# EAGLE board Adafruit BMP280 STEMMA QT (EAGLE 9.6.2)

Size 160 x 100 mm. Coordinates in mm from the lower left corner, seen from the top.
Outline: 0,0 160,0 160,100 0,100 0,0
Copper layers (1*16): Top 0.035mm / dielectric 1.5mm / Bottom 0.035mm
Design rules "default": minimum track width 6mil, minimum drill 0.35mm, track to track 6mil, track to pad 6mil, pad to pad 6mil, via to via 6mil, smd to smd 6mil, copper to edge 40mil, drill to drill 6mil, minimum pad ring 10mil, minimum via ring 8mil, stop-mask expansion 4mil, vias tented up to drill 0mil, thermal gap 10mil
Net classes: 1 highpower: width 0.305 mm, drill 0.483 mm; 2 lowpower: width 0.305 mm, drill 0.483 mm

## Footprints (pad centres in the part's own frame; a part is rotated, then mirrored left to right if it is on the bottom)
0603-NO = smd 1.075 x 1: 1 -0.85,0; 2 0.85,0
0805-NO = smd 1.24 x 1.5: 1 -0.95,0; 2 0.95,0
JST_SH4 = smd 0.6 x 1.55: 1 -1.5,2.514; 2 -0.5,2.514; 3 0.5,2.514; 4 1.5,2.514 | smd 1.2 x 1.8: MT1 -2.8,-1.386; MT2 2.8,-1.386
CHIPLED_0603_NOOUTLINE = smd 0.8 x 0.8: A 0,-0.75; C 0,0.75
SOD-323 = smd 1.35 x 0.8: A 1.27,0; C -1.27,0
FIDUCIAL_1MM = smd 1 x 1: 1 0,0
1X07_ROUND_70 = drill 1 pad 1.778: 1 -7.62,0; 2 -5.08,0; 3 -2.54,0; 4 0,0; 5 2.54,0; 6 5.08,0; 7 7.62,0
SOT363 = smd 0.5 x 0.5: 1 -0.75,-0.9; 3 0.75,-0.9; 4 0.75,0.9; 6 -0.75,0.9 | smd 0.4 x 0.5: 2 0,-0.9; 5 0,0.9
RESPACK_4X0603 = smd 0.45 x 0.9: 1 -1.3,-0.85; 2 -0.4,-0.85; 3 0.4,-0.85; 4 1.3,-0.85; 5 1.3,0.85; 6 0.4,0.85; 7 -0.4,0.85; 8 -1.3,0.85
SOLDERJUMPER_ARROW_NOPASTE = smd 0.762 x 1.524: 1 -1.016,0; 2 1.016,0
BMX280_COMBO = smd 0.725 x 0.35: 1 0.925,0.975; 2 0.925,0.325; 3 0.925,-0.325; 4 0.925,-0.975; 5 -0.925,-0.975; 6 -0.925,-0.325; 7 -0.925,0.325; 8 -0.925,0.975
SOT23-5 = smd 0.55 x 1.2: 1 -0.95,-1.3; 2 0,-1.3; 3 0.95,-1.3; 4 0.95,1.3; 5 -0.95,1.3
MOUNTINGHOLE_2.5_PLATED = drill 2.5 pad 3.2: P$1 0,0

## Placement (x,y rotation side)
C1  0.1uF  [0603-NO]  -27.94,25.4 0 top  (outside the outline)
C2  10uF  [0805-NO]  -16.51,25.4 0 top  (outside the outline)
C3  10uF  [0805-NO]  -22.86,25.4 0 top  (outside the outline)
CONN3  STEMMA_I2C_QT  [JST_SH4]  -16.51,5.08 0 top  (outside the outline)
CONN4  STEMMA_I2C_QT  [JST_SH4]  -25.4,5.08 0 top  (outside the outline)
D1  GREEN  [CHIPLED_0603_NOOUTLINE]  -27.94,21.59 0 top  (outside the outline)
D2  1N4148  [SOD-323]  -15.24,12.7 0 top  (outside the outline)
FID3  FIDUCIAL_1MM  [FIDUCIAL_1MM]  -24.13,27.94 0 top  (outside the outline)
FID4  FIDUCIAL_1MM  [FIDUCIAL_1MM]  -26.67,27.94 0 top  (outside the outline)
JP1  [1X07_ROUND_70]  -21.59,16.51 0 top  (outside the outline)
Q2  BSS138  [SOT363]  -34.29,21.59 0 top  (outside the outline)
R1  10K  [0603-NO]  -33.02,25.4 0 top  (outside the outline)
R3  10K  [RESPACK_4X0603]  -33.02,3.81 0 top  (outside the outline)
R4  10K  [0603-NO]  -16.51,27.94 0 top  (outside the outline)
R5  10K  [0603-NO]  -21.59,27.94 0 top  (outside the outline)
SJ1  [SOLDERJUMPER_ARROW_NOPASTE]  -22.86,21.59 0 top  (outside the outline)
U1  [BMX280_COMBO]  -30.48,12.7 0 top  (outside the outline)
U2  AP2112K-3.3  [SOT23-5]  -19.05,21.59 0 top  (outside the outline)
U$1  MOUNTINGHOLE2.5  [MOUNTINGHOLE_2.5_PLATED]  -20.32,12.7 0 top  (outside the outline)
U$17  MOUNTINGHOLE2.5  [MOUNTINGHOLE_2.5_PLATED]  -25.4,12.7 0 top  (outside the outline)

## Library data of the parts
C1-C3 CONN3 CONN4 D1 D2 JP1 Q2 R1 R3-R5 U2 = microbuilder
FID3 FID4 SJ1 U$1 U$17 = microbuilder; BOM: EXCLUDE
U1 = adafruit_sensor

## Nets
3.3V [lowpower]: C1.1 C3.1 JP1.2 Q2.2 Q2.5 R1.1 R3.2 R3.4 R4.2 R5.2 U1.6 U1.8 U2.5
CS: D2.C JP1.7
CS_3V: D2.A R5.1 U1.2
GND [highpower]: C1.2 C2.2 C3.2 CONN3.1 CONN4.1 D1.C JP1.3 SJ1.2 U1.1 U1.7 U2.2
N$1: D1.A R1.2
SCK/SCL: CONN3.4 CONN4.4 JP1.4 Q2.6 R3.8
SCK_3V: Q2.1 R3.7 U1.4
SDI/SDA: CONN3.3 CONN4.3 JP1.6 Q2.3 R3.6
SDI_3V: Q2.4 R3.5 U1.3
SDO/ADR: JP1.5 R4.1 SJ1.1 U1.5
VCC [highpower]: C2.1 CONN3.2 CONN4.2 JP1.1 R3.1 R3.3 U2.1 U2.3

## Tracks (layer width: path | path; a pad name or v marks a point on that pad's centre or on a via)
3.3V  (12 unrouted)
CS  (1 unrouted)
CS_3V  (2 unrouted)
GND  (10 unrouted)
N$1  (1 unrouted)
SCK/SCL  (4 unrouted)
SCK_3V  (2 unrouted)
SDI/SDA  (4 unrouted)
SDI_3V  (2 unrouted)
SDO/ADR  (3 unrouted)
VCC  (7 unrouted)